# Altium PCB draft.PcbDoc
Units mm, origin at the board's own origin, x right, y up, seen from the top; angles counter-clockwise.
Board outline 80 x 100 mm, 2 copper layers (Top Layer, Bottom Layer); 56 components, 42 nets, 287 pads, 4 vias.
Unrouted connection lines stored in the file: 148.
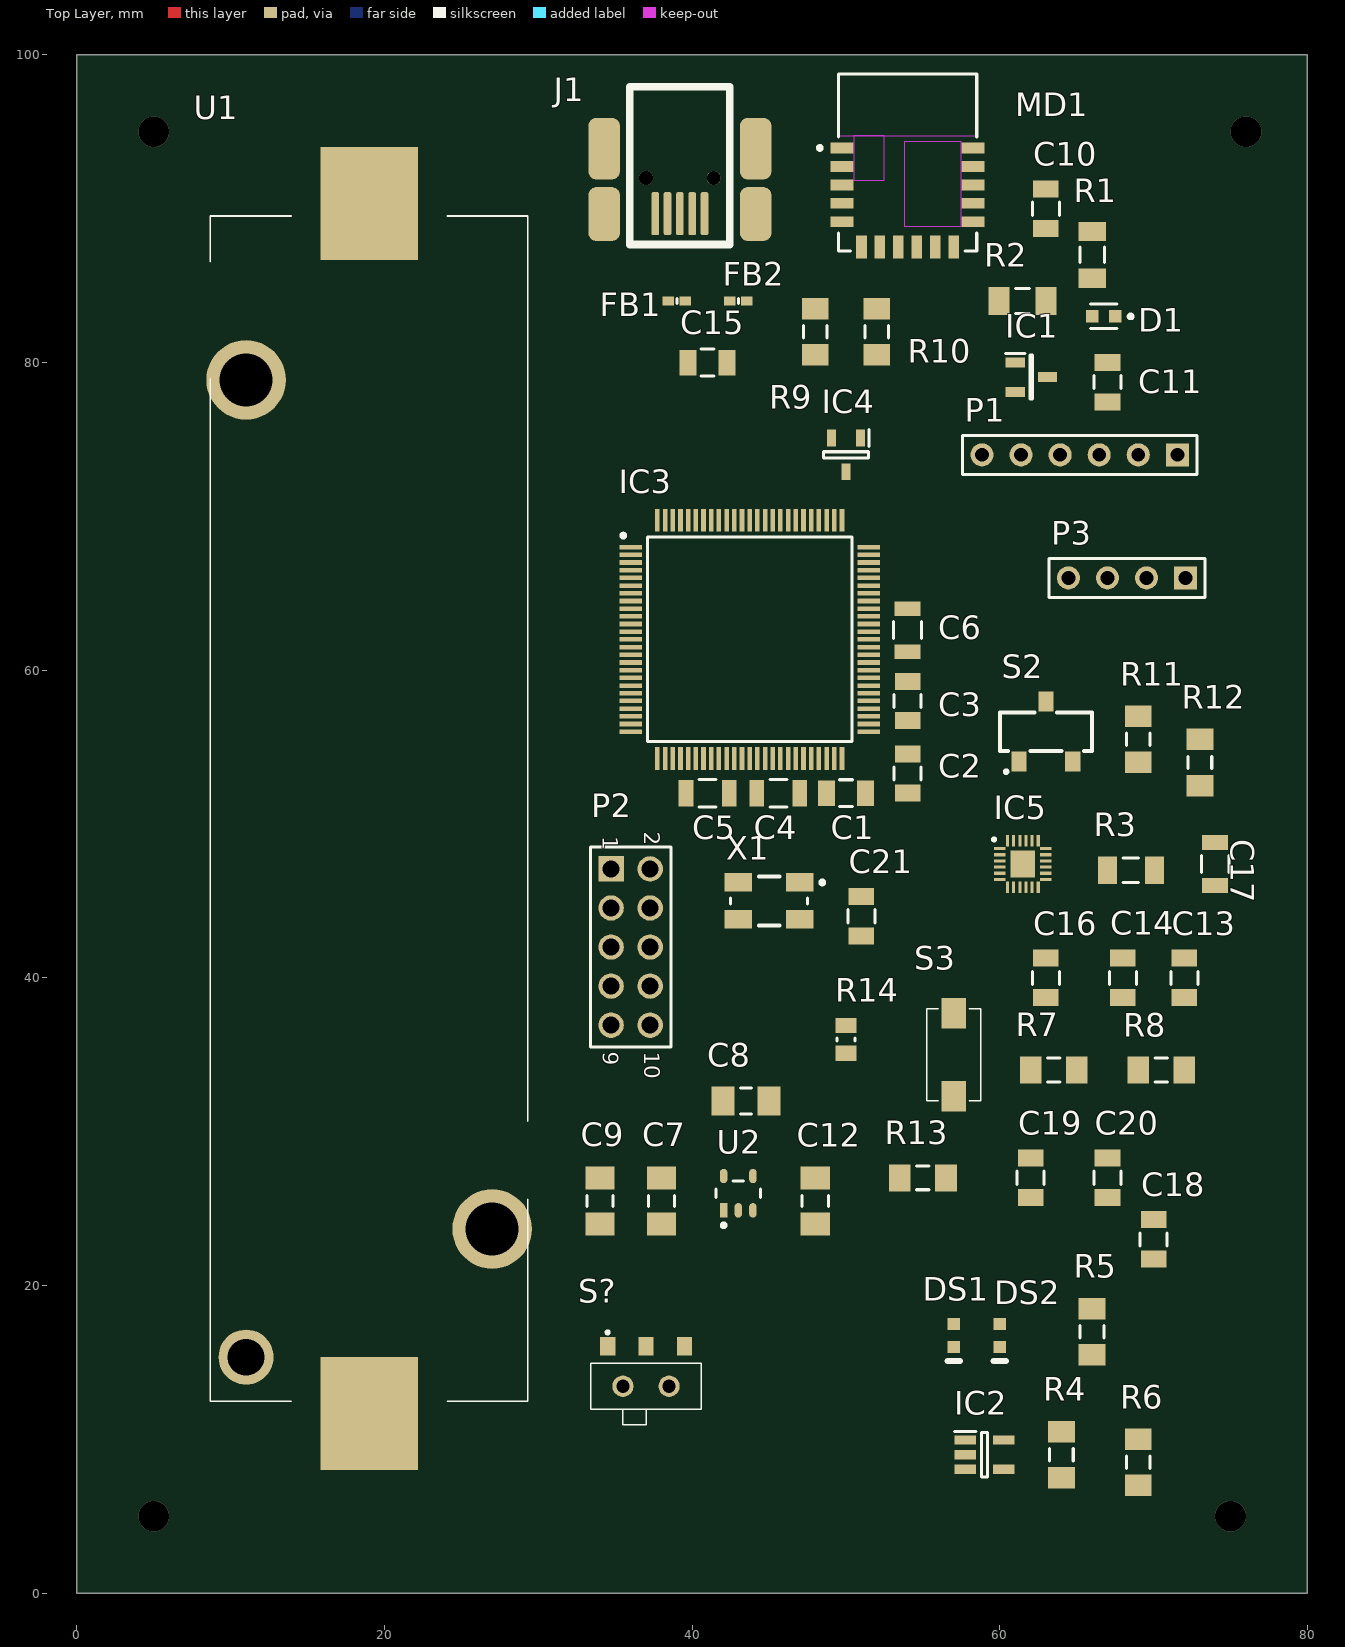
[diagram p0: Top Layer view]
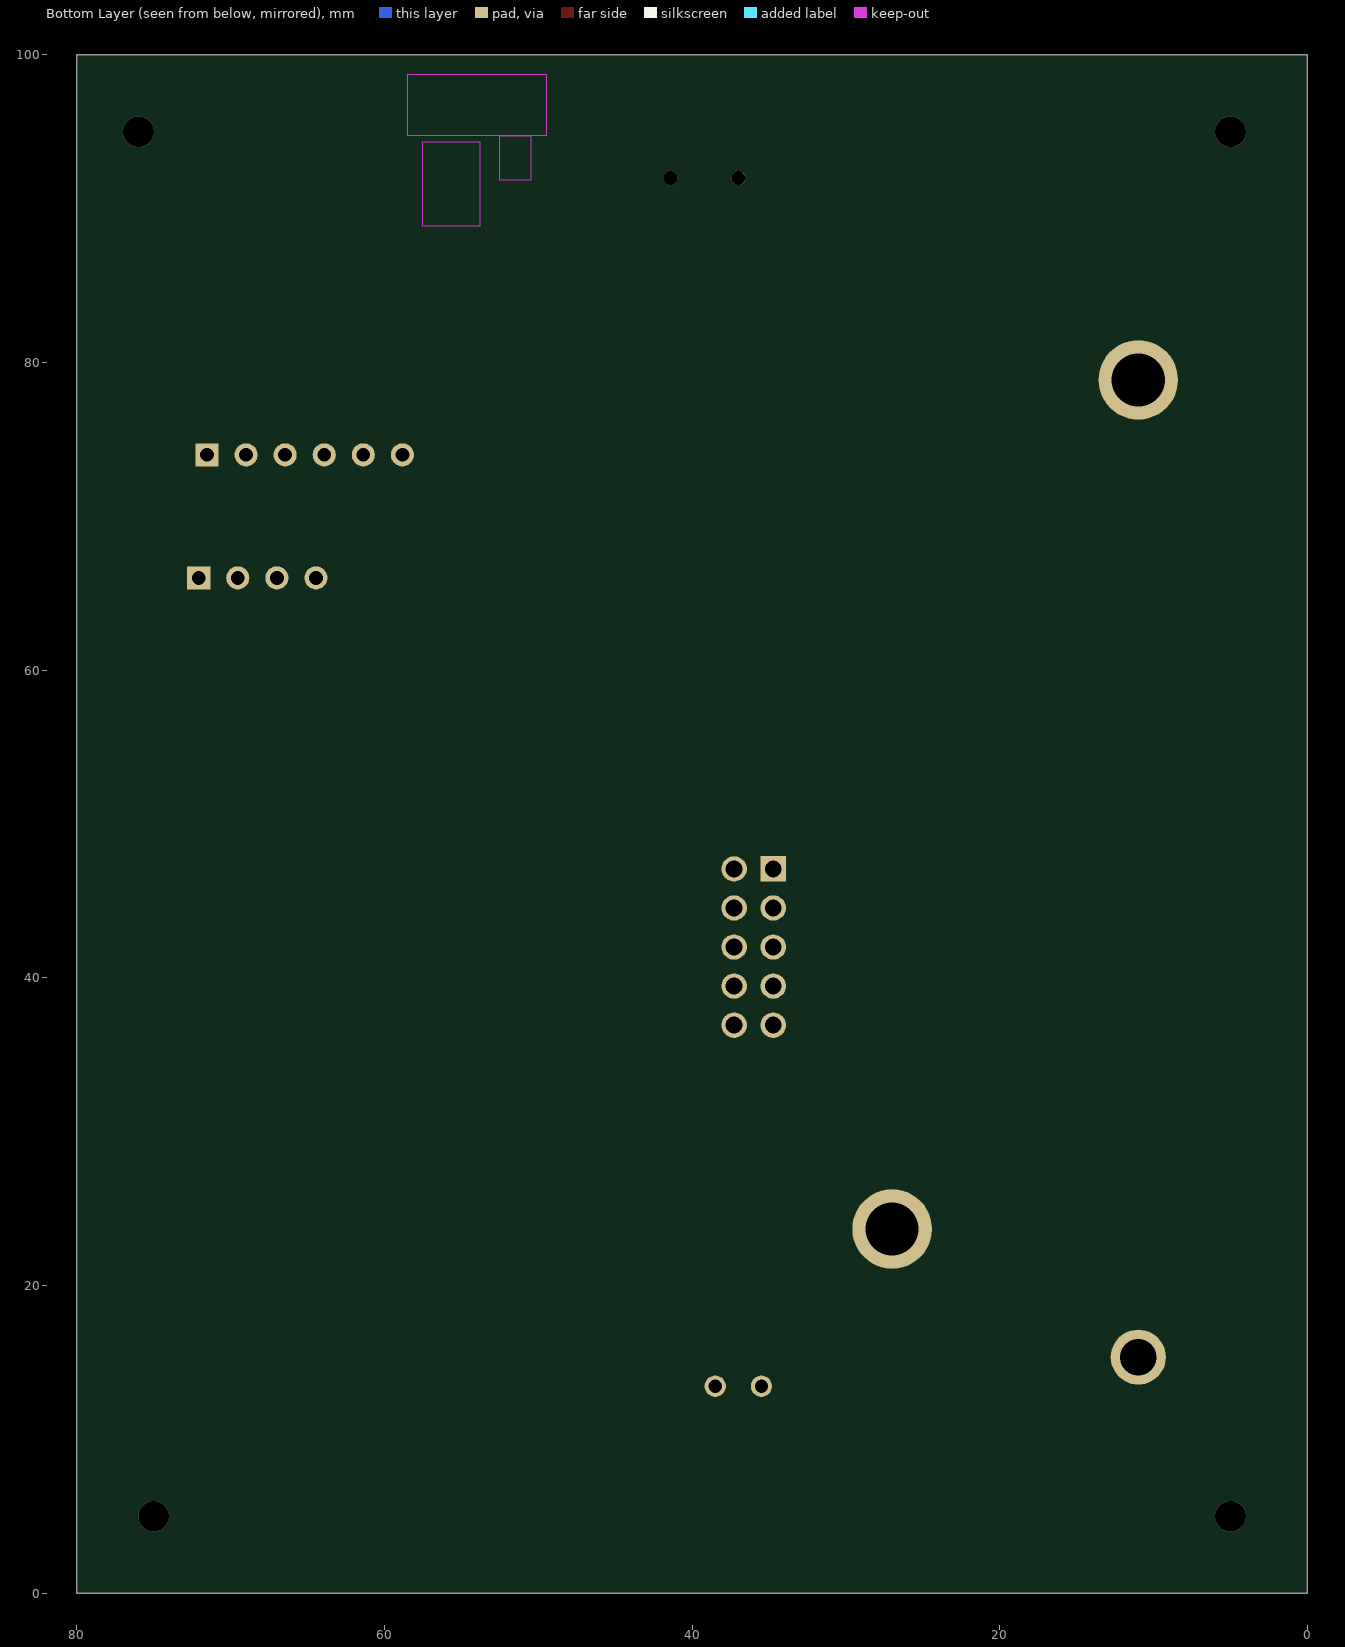
[diagram p1: Bottom Layer view, seen from below]

## Layer stack, top to bottom
Top Solder: solder mask 0.0102, Solder Resist, Dk 3.5
Top Layer: signal copper 0.0356
Dielectric 1: dielectric 0.32, FR-4, Dk 4.8
Bottom Layer: signal copper 0.0356
Bottom Solder: solder mask 0.0102, Solder Resist, Dk 3.5

## Board outline
0,0 80,0 80,100 0,100

## Design rules (kind name [scope] priority, off if disabled: settings)
Clearance [All] p1: gap=0.254 ignorepadtopadclearanceinfootprint=FALSE except(0: Arc-Hole Track-Hole SMDPad-Hole THPad-Hole Via-Hole Fill-Hole Poly-Hole Region-Hole Text-Hole)
PolygonConnect [All] p1: connectstyle=Relief reliefconductorwidth=0.254 reliefentries=4 polygonreliefangle="90 Angle" airgapwidth=0.254
RoutingVias [All] p1: holewidth=0.711 width=1.27 viastyle="Through Hole" minholewidth=0.711 minwidth=1.27 maxholewidth=0.711 maxwidth=1.27
SolderMaskExpansion [All] p1: expansion=0.102
Width [All] p1: maxlimit=0.254 minlimit=0.254 preferedwidth=0.254
30 further rules are at their usual default settings.

## Components (designator, comment, footprint, x,y, rotation, side; value= is the part's Value field where it differs from the comment)
C1 "CL31B105KOFNNNE" FP-CL31-IPC_C 50,52 r0 top
C2 "CL31B105KOFNNNE" FP-CL31-IPC_C 54,53.276 r270 top
C3 "CL31B105KOFNNNE" FP-CL31-IPC_C 54,58 r270 top
C4 "C1206C104K1RACTU" FP-C1206C-EB-MFG 45.6,52 r0 top value="0.10 µF"
C5 "C1206C104K1RACTU" FP-C1206C-EB-MFG 41,52 r0 top value="0.10 µF"
C6 "C1206C104K1RACTU" FP-C1206C-EB-MFG 54,62.6 r270 top value="0.10 µF"
C7 "C1206C105K3RACTU" CAPC3216X180X50ML20T25 38,25.5 r90 top
C8 "C1206C105K3RACTU" CAPC3216X180X50ML20T25 43.5,32 r0 top
C9 "C1206C105K3RACTU" CAPC3216X180X50ML20T25 34,25.5 r90 top
C10 "???" FP-CL31-IPC_C 63,90 r270 top
C11 "???" FP-CL31-IPC_C 67,78.724 r90 top
C12 "C1206C105K3RACTU" CAPC3216X180X50ML20T25 48,25.5 r270 top
C13 "100nF" FP-CL31-IPC_C 72,40 r90 top
C14 "100nF" FP-CL31-IPC_C 68,40 r90 top
C15 "CL31B105KOFNNNE" FP-CL31-IPC_C 41,80 r180 top
C16 "100nF" FP-CL31-IPC_C 63,40 r270 top
C17 "C1206C104K1RACTU" FP-C1206C-EB-MFG 74,47.4 r270 top value="0.10 µF"
C18 "CL31B105KOFNNNE" FP-CL31-IPC_C 70,23 r90 top
C19 "CL31B105KOFNNNE" FP-CL31-IPC_C 62,27 r90 top
C20 "CL31B105KOFNNNE" FP-CL31-IPC_C 67,27 r90 top
C21 "CL31B105KOFNNNE" FP-CL31-IPC_C 51,44 r270 top
D1 "LTST-C191TBKT" FP-LTST-C191TBKT-MFG 66.75,83 r180 top
DS1 "HSMH-C190" AVAG-HSMX-C190_V 57,16.75 r270 top
DS2 "HSMG-C190" AVAG-HSMX-C190_V 60,16.75 r270 top
FB1 "BKP1005EM331-T" BEADC1005X55N 39,84 r180 top
FB2 "BKP1005EM331-T" BEADC1005X55N 43,84 r0 top
IC1 "MCP111T-240E_TT" SOT95P237X112-3N 62.05,79.05 r0 top
IC2 "MCP73831T-2ACI_OT" SOT95P270X145-5N 59,9 r0 top
IC3 "MK20DX128VLL7" QFP50P1600X1600X170-100N 43.738,62 r0 top
IC4 "GSOT05C-GS08" SOT95P248X115-3N 50,74 r270 top
IC5 "ICM-20948" QFN40P300X300X105-25N-D 61.5,47.4 r0 top
J1 "67503-1020" MOLX-67503-1020_V 40.8,89.675 r270 top
MD1 "RN4871-I/RM130" FP-RN4871-I-RM130-MFG 54,93 r0 top
P1 "Header 6" HDR1X6 71.54,74 r180 top
P2 "61301021121" 61301021121 36,42 r270 top
P3 "Header 4" HDR1X4 72.08,66 r180 top
R1 "RC1206FR-07100KL" RESC3116X65X40ML10T20 66,87 r270 top
R2 "CRCW12064K70FKEA" RESC3216X60X45ML15T20 61.475,84 r0 top
R3 "RC1206FR-07100KL" RESC3116X65X40ML10T20 68.525,47 r0 top
R4 "Resistor 0R +/- 0.05% 1206 250 mW" RESC3116X70X50ML13T20 64,9 r90 top value=470
R5 "Resistor 0R +/- 0.05% 1206 250 mW" RESC3116X70X50ML13T20 66,17 r270 top value=470
R6 "Resistor 0R +/- 0.05% 1206 250 mW" RESC3116X70X50ML13T20 69,8.5 r270 top value=470
R7 "Resistor 0R +/- 0.05% 1206 250 mW" RESC3116X70X50ML13T20 63.5,34 r0 top value=8.2k
R8 "Resistor 0R +/- 0.05% 1206 250 mW" RESC3116X70X50ML13T20 70.5,34 r0 top value=10k
R9 "Resistor 0R +/- 0.05% 1206 250 mW" RESC3116X70X50ML13T20 48,82 r90 top value=470
R10 "Resistor 0R +/- 0.05% 1206 250 mW" RESC3116X70X50ML13T20 52,82 r90 top value=470
R11 "Resistor 0R +/- 0.05% 1206 250 mW" RESC3116X70X50ML13T20 69,55.5 r90 top value=4700
R12 "Resistor 0R +/- 0.05% 1206 250 mW" RESC3116X70X50ML13T20 73,54 r270 top value=4700
R13 "Resistor 0R +/- 0.05% 1206 250 mW" RESC3116X70X50ML13T20 55,27 r0 top value=1M
R14 "RC0805FR-0710KL" RESC2013X60X35NL10T20 50,36 r270 top
S2 "CJS-1200TB" B-TYPE 63,56 r0 top
S3 "EVQ-PE105K" EVQPE105K 57,35 r90 top
S? "AYZ0102AGRLC" AYZ0102AGRLC 37,14 r0 top
U1 "1042P" 1042P 19,51 r270 top
U2 "NCP718ASN330T1G" FP-419AE-01-IPC_C 43,26 r90 top
X1 "ABM3B-8.000MHZ-B2-T" ABRA-ABM3B_V 45,45 r180 top

## Footprints (in the part's own frame and the unit in brackets; to place one, negate y for a bottom-side part, rotate by r counter-clockwise, add the part's x,y. Pads: shape width x height; smd on the part's side, far side on the other; paste and mask are expansions set on the pad)
1042P [mm]
  round 5.175 hole 3.45: 1(-27.87,-8) 2(27.33,8)
  round 3.585 hole 2.39: 3(35.66,-8)
  rect 7.34x6.35 smd: 4(-39.33,0) 5(39.33,0)
  silkscreen extent -38.53,-10.33 38.53,10.33, body extent -42.37,-10.33 42.37,10.33, height 14.1
61301021121 [mm] "Pin Header, pitch 2.54 mm, THT, Vertical, dual row, 10p"
  rect 1.65x1.65 hole 1.1: 1(-5.08,-1.27)
  round 1.65 hole 1.1: 2(-5.08,1.27) 3(-2.54,-1.27) 4(-2.54,1.27) 5(0,-1.27) 6(0,1.27) 7(2.54,-1.27) 8(2.54,1.27) 9(5.08,-1.27) 10(5.08,1.27)
  silkscreen extent -6.5,-2.62 6.5,2.62, body extent -6.35,-2.54 6.35,2.54, height 8.59
ABRA-ABM3B_V [mm] "SMD, 4-Leads, Body 5x3.2mm"
  rect 1.8x1.2 smd: 1(-2,-1.2) 2(2,-1.2) 3(2,1.2) 4(-2,1.2)
  silkscreen extent -3.58,-1.6 2.5,1.6, body extent -2.5,-1.59 2.5,1.59, height 1.13
AVAG-HSMX-C190_V [mm] "SMD, 2-Leads, Body 1.6x0.8mm, Height 0.9mm"
  rect 0.8x0.8 smd: 1(-0.75,0) 2(0.75,0)
  silkscreen extent 1.65,-0.4 1.65,0.4, body extent -0.8,-0.4 0.8,0.4, height 0.9
AYZ0102AGRLC [mm]
  rect 1x1.2 smd: 1(-2.5,2.05) 2(0,2.05) 3(2.5,2.05)
  round 1.381 hole 0.85: 4(-1.5,-0.55) 5(1.5,-0.55)
  silkscreen extent -3.6,-3.05 3.6,3.05
B-TYPE [mm]
  rect 1x1.3 smd: 1(-1.75,-1.95) 2(0,1.95) 3(1.75,-1.95)
  silkscreen extent -3,-2.68 3,1.25
BEADC1005X55N [mm]
  rect 0.75x0.6 smd: 1(-0.55,0) 2(0.55,0)
  silkscreen extent 0,-0.15 0,0.15, body extent -0.5,-0.25 0.5,0.25, height 0.55
CAPC3216X180X50ML20T25 [mm] "Chip Capacitor, 2-Leads, Body 3.40x1.80mm, IPC Low Density"
  rect 1.5x1.9 smd: 1(-1.5,0) 2(1.5,0)
  silkscreen extent -0.35,-0.85 0.35,0.85, body extent -1.7,-0.9 1.7,0.9, height 1.8
EVQPE105K [mm]
  rect 2x1.6 smd: A1(-2.7,0) B1(2.7,0)
  silkscreen extent -3,-1.75 3,1.75, body extent -3.54,-1.75 3.54,1.75, height 5.1
FP-419AE-01-IPC_C [mm]
  rect 0.94x0.486 smd paste+0 mask+0: 1(-1.115,0.95)
  rrect100% 0.94x0.486 smd paste+0 mask+0: 2(-1.115,0) 3(-1.115,-0.95) 4(1.116,-0.95) 5(1.116,0.95)
  silkscreen extent -2.21,-1.45 0.8,1.45, body extent -1.69,-1.55 1.69,1.55, height 0.25
FP-C1206C-EB-MFG [mm]
  rect 0.95x1.7 smd paste+0 mask+0: 1(-1.4,0) 2(1.4,0)
  silkscreen extent -0.55,-0.9 0.55,0.9, body extent -2,-1 2,1, height 0.25
FP-CL31-IPC_C [mm]
  rect 1.105x1.658 smd paste+0 mask+0: 1(-1.276,0) 2(1.276,0)
  silkscreen extent -0.42,-0.87 0.42,0.87, body extent -1.93,-0.97 1.93,0.97, height 0.25
FP-LTST-C191TBKT-MFG [mm]
  rect 0.8x0.8 smd paste+0 mask+0: 1(-0.75,0) 2(0.75,0)
  silkscreen extent -1.88,-0.8 0.85,0.8, body extent -1.25,-0.55 1.25,0.55, height 0.25
FP-RN4871-I-RM130-MFG [mm]
  rect 1.5x0.7 smd paste+0 mask+0: 1(-4.25,0.95) 2(-4.25,-0.25) 3(-4.25,-1.45) 4(-4.25,-2.65) 5(-4.25,-3.85) 12(4.25,-3.85) 13(4.25,-2.65) 14(4.25,-1.45) 15(4.25,-0.25) 16(4.25,0.95)
  rect 0.7x1.5 smd paste+0 mask+0: 6(-3,-5.5) 7(-1.8,-5.5) 8(-0.6,-5.5) 9(0.6,-5.5) 10(1.8,-5.5) 11(3,-5.5)
  Keep-Out Layer region: -0.2,-4.15 3.5,-4.15 3.5,1.35 -0.2,1.35
  Keep-Out Layer region: -4.5,1.75 4.5,1.75 4.5,5.75 -4.5,5.75
  Keep-Out Layer region: -3.5,-1.15 -1.5,-1.15 -1.5,1.75 -3.5,1.75
  silkscreen extent -5.82,-5.75 4.5,5.75, body extent -5.1,-6.35 5.1,5.85, height 0.25
HDR1X4 [mm] "Connector; Header; 4 Position"
  rect 1.5x1.5 hole 0.9: 1(0,0)
  round 1.5 hole 0.9: 2(2.54,0) 3(5.08,0) 4(7.62,0)
  silkscreen extent -1.27,-1.27 8.89,1.27
HDR1X6 [mm] "Connector; Header; 6 Position"
  rect 1.5x1.5 hole 0.9: 1(0,0)
  round 1.5 hole 0.9: 2(2.54,0) 3(5.08,0) 4(7.62,0) 5(10.16,0) 6(12.7,0)
  silkscreen extent -1.27,-1.27 13.97,1.27
MOLX-67503-1020_V [mm] "Mini USB Connector, SMT, Righer Angle"
  rrect50% 2.8x0.5 smd: 1(0,0) 2(0,-0.8) 3(0,-1.6) 4(0,-2.4) 5(0,-3.2)
  rrect50% 3.5x2.05 smd: 6(0.025,3.325) 8(0.025,-6.525)
  rrect50% 4x2.05 smd: 7(-4.225,3.325) 9(-4.225,-6.525)
  round 0.9 hole 0.9 unplated: X(-2.325,-3.8) Y(-2.325,0.6)
  silkscreen extent -8.25,-4.85 2,1.65, body extent -8.22,-6.56 0.78,3.34, height 3.95
QFN40P300X300X105-25N-D [mm]
  rect 0.75x0.2 smd: 1(-1.5,1) 2(-1.5,0.6) 3(-1.5,0.2) 4(-1.5,-0.2) 5(-1.5,-0.6) 6(-1.5,-1) 13(1.5,-1) 14(1.5,-0.6) 15(1.5,-0.2) 16(1.5,0.2) 17(1.5,0.6) 18(1.5,1)
  rect 0.2x0.75 smd: 7(-1,-1.5) 8(-0.6,-1.5) 9(-0.2,-1.5) 10(0.2,-1.5) 11(0.6,-1.5) 12(1,-1.5) 19(1,1.5) 20(0.6,1.5) 21(0.2,1.5) 22(-0.2,1.5) 23(-0.6,1.5) 24(-1,1.5)
  rect 1.59x1.75 smd: 25(0,0)
  silkscreen extent -1.97,1.5 -1.78,1.7, body extent -1.55,-1.55 1.55,1.55, height 1.05
QFP50P1600X1600X170-100N [mm]
  rect 1.475x0.3 smd: 1(-7.738,6) 2(-7.738,5.5) 3(-7.738,5) 4(-7.738,4.5) 5(-7.738,4) 6(-7.738,3.5) 7(-7.738,3) 8(-7.738,2.5) 9(-7.738,2) 10(-7.738,1.5) 11(-7.738,1) 12(-7.738,0.5) 13(-7.738,0) 14(-7.738,-0.5) 15(-7.738,-1) 16(-7.738,-1.5) 17(-7.738,-2) 18(-7.738,-2.5) 19(-7.738,-3) 20(-7.738,-3.5) 21(-7.738,-4) 22(-7.738,-4.5) 23(-7.738,-5) 24(-7.738,-5.5) 25(-7.738,-6) 51(7.738,-6) 52(7.738,-5.5) 53(7.738,-5) 54(7.738,-4.5) 55(7.738,-4) 56(7.738,-3.5) 57(7.738,-3) 58(7.738,-2.5) 59(7.738,-2) 60(7.738,-1.5) 61(7.738,-1) 62(7.738,-0.5) 63(7.738,0) 64(7.738,0.5) 65(7.738,1) 66(7.738,1.5) 67(7.738,2) 68(7.738,2.5) 69(7.738,3) 70(7.738,3.5) 71(7.738,4) 72(7.738,4.5) 73(7.738,5) 74(7.738,5.5) 75(7.738,6)
  rect 0.3x1.475 smd: 26(-6,-7.738) 27(-5.5,-7.738) 28(-5,-7.738) 29(-4.5,-7.738) 30(-4,-7.738) 31(-3.5,-7.738) 32(-3,-7.738) 33(-2.5,-7.738) 34(-2,-7.738) 35(-1.5,-7.738) 36(-1,-7.738) 37(-0.5,-7.738) 38(0,-7.738) 39(0.5,-7.738) 40(1,-7.738) 41(1.5,-7.738) 42(2,-7.738) 43(2.5,-7.738) 44(3,-7.738) 45(3.5,-7.738) 46(4,-7.738) 47(4.5,-7.738) 48(5,-7.738) 49(5.5,-7.738) 50(6,-7.738) 76(6,7.738) 77(5.5,7.738) 78(5,7.738) 79(4.5,7.738) 80(4,7.738) 81(3.5,7.738) 82(3,7.738) 83(2.5,7.738) 84(2,7.738) 85(1.5,7.738) 86(1,7.738) 87(0.5,7.738) 88(0,7.738) 89(-0.5,7.738) 90(-1,7.738) 91(-1.5,7.738) 92(-2,7.738) 93(-2.5,7.738) 94(-3,7.738) 95(-3.5,7.738) 96(-4,7.738) 97(-4.5,7.738) 98(-5,7.738) 99(-5.5,7.738) 100(-6,7.738)
  silkscreen extent -8.35,-6.65 6.65,6.87, body extent -8,-8 8,8, height 1.7
RESC2013X60X35NL10T20 [mm] "Chip Resistor, 2-Leads, Body 2.1x1.35mm, IPC Medium Density"
  rect 1x1.35 smd: 1(-0.9,0) 2(0.9,0)
  silkscreen extent -0.1,-0.58 0.1,0.58, body extent -1.05,-0.68 1.05,0.67, height 0.6
RESC3116X65X40ML10T20 [mm] "Chip Resistor, 2-Leads, Body 3.10x1.60mm, IPC Low Density"
  rect 1.25x1.8 smd: 1(-1.525,0) 2(1.525,0)
  silkscreen extent -0.5,-0.8 0.5,0.8, body extent -1.6,-0.85 1.6,0.85, height 0.65
RESC3116X70X50ML13T20 [mm] "Chip Resistor, 2-Leads, Body 3.25x1.65mm, IPC Low Density"
  rect 1.4x1.75 smd: 1(-1.5,0) 2(1.5,0)
  silkscreen extent -0.4,-0.77 0.4,0.77, body extent -1.63,-0.82 1.63,0.82, height 0.7
RESC3216X60X45ML15T20 [mm] "Chip Resistor, 2-Leads, Body 3.3x1.75mm, IPC Low Density"
  rect 1.35x1.85 smd: 1(-1.525,0) 2(1.525,0)
  silkscreen extent -0.45,-0.82 0.45,0.82, body extent -1.65,-0.87 1.65,0.87, height 0.6
SOT95P237X112-3N [mm]
  rect 1.25x0.65 smd: 1(-1.05,0.95) 2(-1.05,-0.95) 3(1.05,0)
  silkscreen extent -1.68,-1.43 0.08,1.53, body extent -1.18,-1.43 1.18,1.43, height 1.12
SOT95P248X115-3N [mm]
  rect 1.1x0.6 smd: 1(-1.1,0.95) 2(-1.1,-0.95) 3(1.1,0)
  silkscreen extent -1.65,-1.48 0.2,1.5, body extent -1.24,-1.48 1.24,1.48, height 1.15
SOT95P270X145-5N [mm]
  rect 1.4x0.6 smd: 1(-1.25,0.95) 2(-1.25,0) 3(-1.25,-0.95) 4(1.25,-0.95) 5(1.25,0.95)
  silkscreen extent -1.95,-1.45 0.2,1.5, body extent -1.35,-1.45 1.35,1.45, height 1.45

## Part data
C1 C2 C3 C10 C11 C13 C14 C15 C16 C18 C19 C20 C21: library part CMP-13271-000025-1, "Cap Ceramic 1uF 16V X7R ±10% SMD 1206 +125°C Embossed T/R", Capacitance=1uF, Case/Package=1206, Case Code (Metric)=3216, Dielectric=X7R, Max Operating Temperature=125°C, Min Operating Temperature=-55°C, Package Quantity=1, Tolerance=10%, Voltage=16V, Case Code (Imperial)=1206, Contact Plating=Tin, Depth=1.6mm, Height=1.25mm, Lead Free="Lead Free", Length=3.2mm, Material=Ceramic, Mount="Surface Mount", Packaging="Tape and Reel", Radiation Hardening=No, Thickness=0.055inch, Voltage Rating=16V, Voltage Rating (DC)=16V, Width=0.063inch
C4 C5 C6 C17: library part CMP-03020-000153-1, "CAP CER 0.1UF 100V X7R 1206", Capacitance="0.10 µF", Manufacturer=KEMET, Package=C1206C-EB, Temperature="-55°C to +150°C", Temperature Characteristic=X7R, Temperature Coefficient=15%, Temperature Range High=+150°C, Temperature Range Low=-55°C, Tolerance=0.1, Voltage Rating="100 V", Automotive=Yes, Automotive Grade="Grade 0", Category=Cap, ComponentLink2Description=Datasheet, ComponentLink2URL=https://content.kemet.com/datasheets/KEM_C1007_X8R_ULTRA_150C_SMD.pdf, Device Class L1="Passive Components", Device Class L2=Capacitors, Device Class L3="Ceramic Capacitors", Digikey Description="CAP CER 0.1UF 100V X7R 1206", Height=0.88mm, Ipc Land Pattern Name=CAPC320160X78, Lead Free=Yes, Manufacturer Part Number=C1206C104K1RACTU, Material=Ceramic, Mouser Description="CAP CER 0.1UF 100V X7R 1206", Octopart=https://octopart.com/c1206c104k1ractu-kemet-89521, RoHS=TRUE
C7 C8 C9 C12: library part CMP-2000-04991-1, "Chip Capacitor, 1 uF, +/- 10%, 25 V, -55 to 125 degC, 1206 (3216 Metric), RoHS, Tape and Reel", Capacitance=1uF, Capacitance - nF=1000nF, Case Code - in=1206, Case Code - mm=3216, Case Height=1.6mm, Case Length=3.2mm, Dielectric=X7R, Manufacturer=Kemet, Maximum Operating Temperature=+125C, Minimum Operating Temperature=-55C, Operating Temperature Range=-55Cto+125C, Package / Case=1206(3216metric), Package Description="2-Pin Surface Mount Device, Body 3.2 x 1.6 mm", Temperature Coefficient / Code=+/-15%, Tolerance=10%, Voltage Rating=25V, =C1206C105K3RAC7800, Brand=Kemet, Case Width=1.6mm, Class=Class1, Datasheet URL=https://ciiva.com/datasheet-click-18194173?src=ciiva&sig=6daff8c4, Datasheet Version=Jul-14, Dimensions=1.6mmWx3.2mmLx1.6mmH, Factory Pack Quantity=2000, Manufacturer URL=http://www.kemet.com/, Package Reference=1206, Packaging=Reel, Product=GeneralTypeMLCCs, Product Category=MultilayerCeramicCapacitorsMLCC-SMD/SMT, RoHS=Details, Series=C1206C, Termination Style=SMD/SMT, Type=SMDMLCCX7R6.3-250VDCCommericalGrade, Voltage Rating DC=25V
D1: library part CMP-22017-000008-1, "LED BLUE CLEAR CHIP SMD", Case/Package=0603, Case Code (Metric)=1608, Color=Blue, Forward Current=20mA, Forward Voltage=3.8V, Lens Color=Colorless, Max Operating Temperature=80°C, Max Power Dissipation=75mW, Min Operating Temperature=-20°C, Package Quantity=1, Power Dissipation=76mW, Reverse Voltage=5V, Case Code (Imperial)=0603, Depth=1.6mm, Dominant Wavelength=475nm, Height=0.55mm, Illumination Color=Blue, Lead Free="Lead Free", Length=0.8mm, Lens Style=Diffused, Lens Transparency=Clear, Luminous Intensity=180mcd, Mount="Surface Mount", Number of Elements=1, Number of LEDs=1, Number of Pins=2, Packaging="Tape and Reel", Radiation Hardening=No, Test Current=20mA, Viewing Angle=130°, Wavelength=468nm, Width=0.8mm
DS1: library part CMP-1744-00004-1, "LED Uni-Color Red, 65 mW, 20 mA, -40 to 85 degC, 2-Pin SMD, RoHS, Tape and Reel", Current Rating="1 A", Max Operating Temperature="85 degC", Min Operating Temperature="-30 degC", Package Quantity=2000, ComponentLink1Description="Manufacturer URL", ComponentLink1URL=http://www.avagotech.com/, ComponentLink2Description=Datasheet, ComponentLink2URL=http://docs.avagotech.com/docs/AV02-0551EN, ComponentLink3Description="Package Specification", ComponentLink3URL=http://www.fairchildsemi.com/dwg/MA/MA03D.pdf, Connector Type=USB, Contact Material=Copper, Contact Plating=Gold, DatasheetVersion=Mar-12, Gender=Male, Height="2.8 mm", Lead Pitch="0.65 mm", Length="7.5 mm", Mount="Surface Mount", PackageDescription="2-Pin Surface Mount Device, Body 1.6 x 0.8 mm, Height 0.9 mm", PackageReference=HSMX-C190, Packaging="Tape and Reel", Pins=5, REACH SVHC="No SVHC", RoHSCompliant=true, Width="5.6 mm"
DS2: library part CMP-1744-00002-1, "Chip LED, Green, 2.2 V, -40 to 85 degC, 2-Pin SMD, RoHS, Tape and Reel", Case\Package=SOIC, Clock Frequency="100 KHz", Frequency="400 KHz", Max Operating Temperature="85 degC", Max Supply Voltage="5.5 V", Min Operating Temperature="-40 degC", Min Supply Voltage="1.7 V", Nominal Supply Current="2 mA", Package Quantity=3000, Access Time="3500 ns", ComponentLink1Description="Manufacturer URL", ComponentLink1URL=http://www.avagotech.com/, ComponentLink2Description=Datasheet, ComponentLink2URL=http://docs.avagotech.com/docs/AV02-0551EN, ComponentLink3Description="Package Specification", ComponentLink3URL=http://www.fairchildsemi.com/dwg/MA/MA03D.pdf, DatasheetVersion=Mar-12, Density="32 kb", Height="1.5 mm", Interface=Serial, Length="5 mm", Max Clock Frequency="100 KHz", Mount="Surface Mount", PackageDescription="2-Pin Surface Mount Device, Body 1.6 x 0.8 mm, Height 0.9 mm", PackageReference=HSMX-C190, Packaging="Tape and Reel", Pins=8, Radiation Hardening=No, REACH SVHC="No SVHC", RoHSCompliant=true, Width="4 mm"
FB1 FB2: "Ferrite Bead", Manufacturer_Name="TAIYO YUDEN", Mouser Part Number=963-BKP1005EM331-T, Arrow Part Number=BKP1005EM331-T, Datasheet Link=http://ds.yuden.co.jp/TYCOMPAS/ut/detail.do?productNo=BKP1005EM331-T&fileName=BKP1005EM331-T_SS&mode=specSheetDownload, Height=0.55mm, Manufacturer_Part_Number=BKP1005EM331-T, Mouser Price/Stock=https://www.mouser.com/Search/Refine.aspx?Keyword=963-BKP1005EM331-T
IC1: "Integrated Circuit", Arrow Part Number=MCP111T-240E/TT, Manufacturer_Name=Microchip, Mouser Part Number=579-MCP111T-240E/TT, Arrow Price/Stock=https://www.arrow.com/en/products/mcp111t-240ett/microchip-technology, Datasheet Link=https://componentsearchengine.com/Datasheets/2/MCP111T-240E_TT.pdf, Height=1.12mm, Manufacturer_Part_Number=MCP111T-240E/TT, Mouser Price/Stock=https://www.mouser.co.uk/ProductDetail/Microchip-Technology/MCP111T-240E-TT?qs=L9Ynyw3fbhE3rmLkD5w19g%3D%3D
IC2: "Integrated Circuit", Arrow Part Number=MCP73831T-2ACI/OT, Manufacturer_Name=Microchip, Mouser Part Number=579-MCP73831T-2ACIOT, Arrow Price/Stock=https://www.arrow.com/en/products/mcp73831t-2aciot/microchip-technology, Datasheet Link=http://ww1.microchip.com/downloads/en/DeviceDoc/20001984g.pdf, Height=1.45mm, Manufacturer_Part_Number=MCP73831T-2ACI/OT, Mouser Price/Stock=https://www.mouser.co.uk/ProductDetail/Microchip-Technology/MCP73831T-2ACI-OT?qs=yUQqVecv4qvbBQBGbHx0Mw%3D%3D
IC3: "Integrated Circuit", Manufacturer_Name=NXP, Mouser Part Number=841-MK20DX128VLL7, Arrow Part Number=MK20DX128VLL7, Arrow Price/Stock=https://www.arrow.com/en/products/mk20dx128vll7/nxp-semiconductors, Datasheet Link=http://www.nxp.com/docs/en/data-sheet/K20P100M72SF1.pdf, Height=1.7mm, Manufacturer_Part_Number=MK20DX128VLL7, Mouser Price/Stock=https://www.mouser.co.uk/ProductDetail/NXP-Semiconductors/MK20DX128VLL7?qs=WtedIhRlNpuHThscd5qw9w%3D%3D
IC4: "Integrated Circuit", Manufacturer_Name=Vishay, Mouser Part Number=78-GSOT05C, Arrow Part Number=GSOT05C-GS08, Datasheet Link=https://www.vishay.com/docs/85824/gsot03c.pdf, Height=1.15mm, Manufacturer_Part_Number=GSOT05C-GS08, Mouser Price/Stock=https://www.mouser.com/Search/Refine.aspx?Keyword=78-GSOT05C
IC5: "Integrated Circuit", Manufacturer_Name="InvenSense Inc.", Mouser Part Number=410-ICM-20948, Arrow Part Number=ICM-20948, Arrow Price/Stock=https://www.arrow.com/en/products/icm-20948/invensense, Datasheet Link=https://www.invensense.com/wp-content/uploads/2016/06/DS-000189-ICM-20948-v1.3.pdf, Height=1.05mm, Manufacturer_Part_Number=ICM-20948, Mouser Price/Stock=https://www.mouser.co.uk/ProductDetail/TDK-InvenSense/ICM-20948?qs=u4fy%2FsgLU9OtGc31yF%2Friw%3D%3D
J1: library part CMP-0411-00002-1, "USB, MINI, SMD, RA KME04-USBMU03A01", Manufacturer=Molex, ComponentLink1Description="Manufacturer URL", ComponentLink1URL=http://www.molex.com/, ComponentLink2Description=Datasheet, ComponentLink2URL=http://www.molex.com/pdm_docs/sd/675031020_sd.pdf, DatasheetVersion="Rev F, 06/2009", Mounting Technology="Surface Mount", PackageDescription="Mini USB Connector, SMT, Righer Angle", PackageReference=67503-1020, PartNumber=67503-1020, Terminal Pitch="0.8 mm"
MD1: library part CMP-06331-000010-1, "BLUETOOTH BLE MODULE, SHIELDED,", Manufacturer=Microchip, Max Frequency=2.48GHz, Max Supply Voltage=3.6V, Min Supply Voltage=1.9V, Nominal Supply Current=80-2230uA, Package=0, Receiving Current=10mA, Temperature="-40°C to +85°C", Temperature Range High=+85°C, Temperature Range Low=-40°C, Automotive=No, Bandwidth=78MHz, Category=UNK, ComponentLink2Description=Datasheet, ComponentLink2URL=http://ww1.microchip.com/downloads/en/DeviceDoc/RN4870-71-Bluetooth-Low-Energy-Module-Data-Sheet-DS50002489D.pdf, Data Rate=10kbits/s, Device Class L1="Integrated Circuits (ICs)", Device Class L2="RF Semiconductors and Devices", Device Class L3=Transceivers, Digikey Description="BLUETOOTH BLE MODULE, SHIELDED,", Height=2.16mm, Interface=I2C,SPI,UART,Other, Lead Free=Yes, Manufacturer Part Number=RN4871-I/RM130, Mouser Description="Bluetooth Ble Module, Shielded, Antenna, Ascii Interface, 9X11.5Mm 16 Module 11.5X9x2.1 Mm Tray", Number Of Gpio=4, Octopart=https://octopart.com/rn4871-i%2Frm130-microchip-92006868, RoHS=TRUE, Sensitivity=-90dBm, Transmitting Current=10mA
P1: "Header, 6-Pin", LatestRevisionDate=17-Jul-2002, LatestRevisionNote="Re-released for DXP Platform.", Publisher="Altium Limited"
P2: library part CMP-1502-01084-1, "THT Vertical Pin Header WR-PHD, Pitch 2.54 mm, Dual Row, 10 pins", Contact Resistance=20mOhm, Manufacturer="Wurth Elektronik", Operating Temperature=-40to105degC, Rated Current=3A, Withstanding Voltage=500VAC, Working Voltage=250VAC, Datasheet URL=https://katalog.we-online.de/em/datasheet/6130xx21121.pdf, Gender=Male, Manufacturer URL=http://www.we-online.de, Mounting Technology=THT, Orientation=Vertical, Package Reference=61301021121, Packaging=Bag, Part Number=61301021121, Pin Number=10, Pitch=2.54mm, Publisher=WurthElektronik, Row Number=Dual
P3: "Header, 4-Pin", LatestRevisionDate=17-Jul-2002, LatestRevisionNote="Re-released for DXP Platform.", Publisher="Altium Limited"
R1 R3: library part CMP-2100-03674-1, "Chip Resistor, 100 KOhm, +/- 1%, 0.25 W, -55 to 155 degC, 1206 (3216 Metric), RoHS, Tape and Reel", Case/Package=1206, Case Code (Metric)=3216, Manufacturer=Yageo, Max Operating Temperature=155degC, Min Operating Temperature=-55degC, Package Description="2-Pin Surface Mount Device, Body 3.1 x 1.6 mm", Package Reference=1206.0, Power Rating=250mW, Resistance=100KOhm, Temperature Coefficient=100ppm/degreesC, Tolerance=1%, Voltage Rating=200V, Case Code (Imperial)=1206, Composition=ThickFilm, Datasheet URL=http://www.yageo.com/NewPortal/yageodocoutput?fileName=/pdf/R-Chip/PYu-RC_Group_51_RoHS_L_5.pdf, Datasheet Version="Rev. 5, 10/2016", Depth=1.6mm, Height=0.55mm, Lead Free=LeadFree, Length=3.1mm, Manufacturer URL=http://www.yageo.com/, Packaging=TapeandReel, REACH SVHC=NoSVHC, RoHSCompliant=true, Termination=SMD/SMT
R2: library part CMP-2100-03618-1, "Chip Resistor, 4.7 KOhm, +/- 1%, 0.25 W, -55 to 155 degC, 1206 (3216 Metric), RoHS, Tape and Reel", Case/Package=1206, Case Code (Metric)=3216, Manufacturer="Vishay Semiconductor", Max Operating Temperature=155degC, Max Power Dissipation=250mW, Min Operating Temperature=-55degC, Package Description="2-Pin Surface Mount Device, Body 3.15 x 1.6 mm", Package Quantity=10, Package Reference=1206.0, Resistance=4.7KOhm, Temperature Coefficient=100ppm/degreesC, Tolerance=1%, Voltage Rating=200V, Case Code (Imperial)=1206, Composition=ThickFilm, Contact Plating=Tin, Datasheet URL=http://www.vishay.com/docs/20035/dcrcwe3.pdf, Datasheet Version=41061.0, Depth=1.6mm, Height=0.55mm, Lead Free=LeadFree, Length=3.2mm, Manufacturer URL=http://www.vishay.com/, Military Standard=Not, Mount=SurfaceMount, Number of Terminations=2, Packaging=TapeandReel, Power Rating=250mW, Radiation Hardening=No, REACH SVHC=Unknown, RoHSCompliant=true, Termination=SMD/SMT, Voltage Rating (DC)=200V, Weight=0.000353oz, Width=1.6mm
R4 R5 R6 R7 R8 R9 R10 R11 R12 R13: library part CMP-009-00008-4, "Chip Resistor, 0 Ohm, 0.25 W, -55 to 155 degC, 1206 (3216 Metric)", Case/Package=1206, Max Operating Temperature=155°C, Min Operating Temperature=-55°C, Power=250mW, Tolerance=0.05%, Voltage Rating=200V, Mounting Technology=SM, Pins=2, RoHS Compliant=True
R14: library part CMP-1659-00013-4, "Chip Resistor, 10 KOhm, +/- 1%, 0.125 W, -55 to 155 degC, 0805 (2012 Metric), RoHS, Tape and Reel", Manufacturer=Yageo, Max Operating Temperature="155 degC", Min Operating Temperature="-55 degC", Package Quantity=5000, Voltage Rating="150 V", ComponentLink1Description="Manufacturer URL", ComponentLink1URL=http://www.yageo.com/, ComponentLink2Description=Datasheet, ComponentLink2URL=http://www.yageo.com/documents/recent/PYu-RC_Group_51_RoHS_L_04.pdf, DatasheetVersion="Rev. 4, 02/2016", Height="0.5 mm", Length="2 mm", Mount="Surface Mount", Mounting Technology="Surface Mount", PackageDescription="2-Pin Surface Mounted Device, Body 2 x 1.25 mm", PackageReference=0805, Packaging="Tape and Reel", Pins=2, REACH SVHC="No SVHC", RoHSCompliant=true
S2: "Switch", Manufacturer_Name="Copal Electronics", Arrow Part Number=CJS-1200TB, Datasheet Link=http://www.nidec-copal-electronics.com/e/catalog/switch/cjs.pdf, Manufacturer_Part_Number=CJS-1200TB
S3: "Switch (2-Pin Push)", Manufacturer_Name=Panasonic, Mouser Part Number=667-EVQ-PE105K, Arrow Part Number=EVQ-PE105K, Arrow Price/Stock=https://www.arrow.com/en/products/evqpe105k/panasonic, Datasheet Link=https://industrial.panasonic.com/cdbs/www-data/pdf/ATK0000/ATK0000C376.pdf, Height=5mm, Manufacturer_Part_Number=EVQ-PE105K, Mouser Price/Stock=https://www.mouser.co.uk/ProductDetail/Panasonic/EVQ-PE105K?qs=WwqriLBepZvDjHzvpRBUaw%3D%3D
S?: "Switch", Manufacturer_Name="C & K COMPONENTS", Mouser Part Number=611-AYZ0102AGRLC, Arrow Part Number=AYZ0102AGRLC, Arrow Price/Stock=https://www.arrow.com/en/products/ayz0102agrlc/ck, Datasheet Link=https://componentsearchengine.com/Datasheets/3/AYZ0102AGRLC.pdf, Height=1mm, Manufacturer_Part_Number=AYZ0102AGRLC, Mouser Price/Stock=https://www.mouser.co.uk/ProductDetail/CK/AYZ0102AGRLC?qs=dJbzCyn%252BCFYWKwcWEToS6A%3D%3D
U1: "Undefined or Miscellaneous", Manufacturer_Name="Keystone Electronics", Mouser Part Number=534-1042P, Arrow Part Number=1042P, Arrow Price/Stock=https://www.arrow.com/en/products/1042p/keystone-electronics, Datasheet Link=http://www.keyelco.com/product-pdf.cfm?p=13957, Height=14mm, Manufacturer_Part_Number=1042P, Mouser Price/Stock=https://www.mouser.co.uk/ProductDetail/Keystone-Electronics/1042P?qs=g2rIOKKlpoboHyq0g1zn1A%3D%3D
U2: library part CMP-07128-000009-1, "300 MA LOW IQ WIDE INPUT", Dropout Voltage=275mV, Manufacturer="ON Semiconductor", Max Junction Temp=+150°C, Max Supply Voltage=24V, Min Supply Voltage=2.5V, Nominal Supply Current=4uA, Output Current=800mA, Output Voltage=3.3V, Package=419AE-01, Temperature="to +150°C", Accuracy Percentage=2%, Automotive=No, Category=IC, ComponentLink2Description=Datasheet, ComponentLink2URL=https://www.onsemi.com/pub/Collateral/NCP718-D.PDF, Device Class L1="Integrated Circuits (ICs)", Device Class L2="Power Management ICs", Device Class L3="Voltage Regulators - Linear", Digikey Description="300 MA LOW IQ WIDE INPUT", Footprint Url=https://www.onsemi.com/pub/Collateral/419AE.PDF, Height=1mm, Ipc Land Pattern Name=SOT95P280X100-5, Lead Free=Yes, Manufacturer Part Number=NCP718ASN330T1G, Mouser Description="LDO Regulator, 300 mA, Wide Vin, Ultra-Low Iq Fixed 3.3V, Active Discharge, TSOT23-5", Number Of Outputs=1, Octopart=https://octopart.com/ncp718asn330t1g-on+semiconductor-87658778, Output Type=Fixed, RoHS=TRUE, Standoff Height=0.01mm, Temperature Range High=+150°C
X1: library part CMP-1688-00002-1, "Ceramic SMD Crystal, 8 MHz, +/- 20 ppm, 200 Ohm, -20 to 70 degC, 4-Pin SMD, RoHS, Tape and Reel", Max Operating Temperature="85 degC", Max Supply Voltage="45 V", Min Operating Temperature="-40 degC", Min Supply Voltage="8.2 V", Output Current="1.8 A", Output Voltage="3.3 V", Package Quantity=50, Switching Frequency="30 KHz", ComponentLink1Description="Manufacturer URL", ComponentLink1URL=http://www.abracon.com/, ComponentLink2Description=Datasheet, ComponentLink2URL=http://www.abracon.com/Resonators/abm3b.pdf, DatasheetVersion=Aug-15, Height="1.05 mm", Length="9.8 mm", Mount="Surface Mount", Outputs=4, PackageDescription="4-Pin Surface Mount Device, Body 5 x 3.2 mm", PackageReference=ABM3B, Packaging=Rail/Tube, Pins=28, Radiation Hardening=No, REACH SVHC="No SVHC", RoHSCompliant=true, Weight="0.004233 oz", Width="4.5 mm"

## Via types
v1: diameter 2, hole 2, Top Layer to Bottom Layer, 4 vias

## Nets (pads, with @x,y where several pads share a name; then routed paths per layer and width w, separated by ;. In a path a pad name is that pad's centre, name@x,y a point inside that pad or via, vN(x,y) a via of type N, cw(c..) or ccw(c..) an arc to the next point about the centre after c; other vN are vias at no path point)
1.8V: C13.2 IC5.8 IC5.22 R7.2 R8.1
3V3: C1.1 C2.1 C3.1 C4.1 C5.1 C6.1 C8.1 C10.1 C16.1 C17.1 C18.1 D1.2 IC1.3 IC3.8 IC3.22 IC3.23 IC3.40 IC3.48 IC3.61 IC3.75 IC3.89 IC5.9 IC5.13 MD1.14 P1.1 P2.1 R2.2 R3.1 R7.1 R11.1 R12.1 R14.2 U2.5
Bluetooth_Backup_RX: IC3.99 P1.5
Bluetooth_Backup_TX: IC3.100 P1.4
Bluetooth_RX: IC3.1 MD1.7
Bluetooth_TX: IC3.2 MD1.8
Charging: C9.1 IC2.3 S?.1 U1.5
GND: C7.2 C8.2 C9.2 C10.2 C11.1 C12.2 C13.1 C14.1 C15.2 C16.2 C17.2 C18.2 C19.2 C20.2 C21.2 FB1.2 IC1.2 IC2.2 IC3.9 IC3.24 IC3.25 IC3.41 IC3.49 IC3.60 IC3.74 IC3.88 IC5.11 IC5.18 IC5.20 J1.5 MD1.2 MD1.13 P1.6 P2.9 R4.1 R6.2 R8.2 S2.1 S3.B1 U1.4 U2.2 U2.4 X1.2 X1.4
GPIO: IC3.35 IC5.12
NetC1_2: C1.2 C2.2 C3.2 C4.2 C5.2 C6.2
NetC7_1: C7.1 S?.2 U2.1 U2.3
NetC11_2: C11.2 IC1.1 MD1.10 R2.1
NetC14_2: C14.2 IC5.10
NetC19_1: C19.1 IC3.51 R13.1 X1.1
NetC20_1: C20.1 IC3.50 R13.2 X1.3
NetD1_1: D1.1 R1.2
NetDS1_1: DS1.1 R5.1
NetDS1_2: DS1.2 DS2.1 IC2.1
NetDS2_2: DS2.2 R6.1
NetFB1_1: FB1.1 J1.6 J1.7 J1.8 J1.9
NetFB2_1: FB2.1 J1.1
NetIC2_5: IC2.5 R4.2
NetJ1_2: J1.2 R10.2
NetJ1_3: J1.3 R9.2
NetMD1_12: MD1.12 R1.1
NetMD1_16: MD1.16 S2.2
NetP2_3: P2.3 P2.5
NetR3_2: R3.2 S2.3
P5V_USB: C12.1 C15.1 FB2.2 IC2.4 R5.2
RESET_MCU: C21.1 IC3.52 P2.10 R14.1 S3.A1
SCL: IC3.55 IC5.23 P3.2 R11.2
SDA: IC3.54 IC5.24 P3.1 R12.2
SWD_Clk: IC3.34 P2.4
SWD_DIO_TGTMCU: IC3.37 P2.2
UART_Backup_RX: IC3.62 P3.4
UART_Backup_TX: IC3.63 P3.3
UART_CTS_RTS: IC3.3 MD1.9
UART_CTS_RTS_backup: IC3.97 P1.2
UART_RTS_CTS: IC3.4 MD1.11
UART_RTS_CTS_backup: IC3.98 P1.3
USB_DN: IC3.11 IC4.1 R10.1
USB_DP: IC3.10 IC4.2 R9.1
pads on no net: IC3.5 IC3.6 IC3.7 IC3.12 IC3.13 IC3.14 IC3.15 IC3.16 IC3.17 IC3.18 IC3.19 IC3.20 IC3.21 IC3.26 IC3.27 IC3.28 IC3.29 IC3.30 IC3.31 IC3.32 IC3.33 IC3.36 IC3.38 IC3.39 IC3.42 IC3.43 IC3.44 IC3.45 IC3.46 IC3.47 IC3.53 IC3.56 IC3.57 IC3.58 IC3.59 IC3.64 IC3.65 IC3.66 IC3.67 IC3.68 IC3.69 IC3.70 IC3.71 IC3.72 IC3.73 IC3.76 IC3.77 IC3.78 IC3.79 IC3.80 IC3.81 IC3.82 IC3.83 IC3.84 IC3.85 IC3.86 IC3.87 IC3.90 IC3.91 IC3.92 IC3.93 IC3.94 IC3.95 IC3.96 IC4.3 IC5.1 IC5.2 IC5.3 IC5.4 IC5.5 IC5.6 IC5.7 IC5.14 IC5.15 IC5.16 IC5.17 IC5.19 IC5.21 IC5.25 J1.4 J1.X J1.Y MD1.1 MD1.3 MD1.4 MD1.5 MD1.6 MD1.15 P2.6 P2.7 P2.8 S?.3 S?.4 S?.5 U1.1 U1.2 U1.3
copper on no net:
  other v1: 5,5 75,5 5,95 76,95

## Text inside footprints (layer, text, board x,y; h text height)
P2: Top Overlay "10" at 36.9,35.19 h1.02 r270; Top Overlay "9" at 34.2,35.19 h1.02 r270; Top Overlay "1" at 34.2,49.21 h1.02 r270; Top Overlay "2" at 36.9,49.51 h1.02 r270